# EAGLE board CT_schematic (EAGLE 7.6.0)

Size 100 x 80 mm. Coordinates in mm from the lower left corner, seen from the top.
Outline: 0,0 100,0 100,80 0,80 0,0
Copper layers (1*16): Top 0.035mm / dielectric 1.5mm / Bottom 0.035mm
Design rules "default": minimum track width 10mil, minimum drill 24mil, track to track 8mil, track to pad 8mil, pad to pad 8mil, via to via 8mil, smd to smd 8mil, copper to edge 40mil, drill to drill 8mil, minimum pad ring 10mil, minimum via ring 8mil, stop-mask expansion 4mil, vias tented up to drill 0mil, thermal gap 10mil

## Footprints (pad centres in the part's own frame; a part is rotated, then mirrored left to right if it is on the bottom)
C0603 = smd 0.8 x 0.8: 1 -0.762,0; 2 0.762,0
C0402 = smd 0.5 x 0.5: 1 -0.508,0; 2 0.508,0
C1210 = smd 1.2 x 2.5: 1 -1.524,0; 2 1.524,0
C1206 = smd 1.3 x 1.6: 1 -1.524,0; 2 1.524,0
L0603 = smd 0.8 x 0.8: 1 -0.762,0; 2 0.762,0
L1210 = smd 1.2 x 2.5: 1 -1.524,0; 2 1.524,0
R0603 = smd 0.8 x 0.8: 1 -0.762,0; 2 0.762,0
LQFP32 = smd 0.54 x 0.85: 1 -2.8,-4.275; 2 -2,-4.275; 3 -1.2,-4.275; 4 -0.4,-4.275; 5 0.4,-4.275; 6 1.19,-4.275; 7 1.99,-4.275; 8 2.79,-4.275; 17 2.8,4.275; 18 2,4.275; 19 1.2,4.275; 20 0.4,4.275; 21 -0.4,4.275; 22 -1.2,4.275; 23 -2,4.275; 24 -2.8,4.275 | smd 0.85 x 0.54: 9 4.275,-2.8; 10 4.275,-2; 11 4.275,-1.2; 12 4.275,-0.4; 13 4.275,0.4; 14 4.275,1.2; 15 4.275,2; 16 4.275,2.8; 25 -4.275,2.8; 26 -4.275,2; 27 -4.275,1.2; 28 -4.275,0.4; 29 -4.275,-0.4; 30 -4.275,-1.2; 31 -4.275,-2; 32 -4.275,-2.8
SSOP-16 = smd 1.981 x 0.356: 1 -2.464,2.223; 2 -2.464,1.587; 3 -2.464,0.953; 4 -2.464,0.318; 5 -2.464,-0.318; 6 -2.464,-0.953; 7 -2.464,-1.587; 8 -2.464,-2.223; 9 2.464,-2.223; 10 2.464,-1.587; 11 2.464,-0.953; 12 2.464,-0.318; 13 2.464,0.318; 14 2.464,0.953; 15 2.464,1.587; 16 2.464,2.223
HTSS-105-01-G-D = drill 1 pad 1.8 square: 1 0,0 | drill 1 pad 1.8: 2 0,2.54; 3 2.54,0; 4 2.54,2.54; 5 5.08,0; 6 5.08,2.54; 7 7.62,0; 8 7.62,2.54; 9 10.16,0; 10 10.16,2.54
TSSOP20-I = smd 0.4 x 1.35: 1 -2.925,-2.875; 2 -2.275,-2.875; 3 -1.625,-2.875; 4 -0.975,-2.875; 5 -0.325,-2.875; 6 0.325,-2.875; 7 0.975,-2.875; 8 1.625,-2.875; 9 2.275,-2.875; 10 2.925,-2.875; 11 2.925,2.875; 12 2.275,2.875; 13 1.625,2.875; 14 0.975,2.875; 15 0.325,2.875; 16 -0.325,2.875; 17 -0.975,2.875; 18 -1.625,2.875; 19 -2.275,2.875; 20 -2.925,2.875
ASEK = smd 1.4 x 1: 1 -1.1,-0.8; 2 1.1,-0.8; 3 1.1,0.8; 4 -1.1,0.8
ASFL1 = smd 1.7 x 1.5: 1 -1.27,-1.1; 2 1.27,-1.1; 3 1.27,1.1; 4 -1.27,1.1
SOIC-8_EP = smd 1.6 x 0.533: 1 -2.921,1.905; 2 -2.921,0.635; 3 -2.921,-0.635; 4 -2.921,-1.905; 5 2.921,-1.905; 6 2.921,-0.635; 7 2.921,0.635; 8 2.921,1.905 | smd 2.54 x 3.302: EPAD 0,0 | drill 0.406 pad 0.406: P$1 -0.508,0.635; P$2 0.381,0.635; P$3 -0.508,-0.635; P$4 0.381,-0.635
DFN8_2X3MC = smd 0.813 x 0.305: 1 -1.398,0.75; 2 -1.398,0.25; 3 -1.398,-0.25; 4 -1.398,-0.75; 5 1.398,-0.75; 6 1.398,-0.25; 7 1.398,0.25; 8 1.398,0.75 | smd 1.753 x 1.549: 9 0,0
JST-2-SMD = smd 1 x 4.6: 1 -1,-3.7; 2 1,-3.7 | smd 1.6 x 3.4: NC1 -3.4,1.5; NC2 3.4,1.5
FCI_10118193-0001LF = smd 0.4 x 1.35: 1 -1.3,2.675; 2 -0.65,2.675; 3 0,2.675; 4 0.65,2.675; 5 1.3,2.675 | smd 1.6 x 1.4: 6 -3.2,2.45; 7 3.2,2.45 | smd 1.9 x 1.9: 8 -1.2,0; 9 1.2,0 | hole 0.5: -3.3,0; 3.3,0
SON-6 = smd 0.55 x 0.3: 1 -0.355,0.5 | smd 0.52 x 0.3: 2 -0.37,0; 3 -0.37,-0.5; 4 0.37,-0.5; 5 0.37,0; 6 0.37,0.5
SW_4-1437565-2 = smd 1.4 x 2.1: 1 -2.23,4.55; 2 -2.23,-4.55; 3 2.23,4.55; 4 2.23,-4.55
LGM67K-G1J2-24-Z = smd 0.8 x 1.4: A -2,0; C 0,0
NC7SZ125M5X = smd 1.3 x 0.7: 1 -1.3,0.95; 2 -1.3,0; 3 -1.3,-0.95; 4 1.3,-0.95; 5 1.3,0.95
DUMMY_PACKAGE_126 = drill 0.3: 1 0,-1; 2 1.5,-1; 3 3,-1

## Placement (x,y rotation side)
C1  1e-07  [C0603]  -57.15,52.07 0 top  (outside the outline)
C2  1e-07  [C0603]  -60.96,52.07 0 top  (outside the outline)
C3  1e-07  [C0603]  -64.77,52.07 0 top  (outside the outline)
C4  1e-07  [C0603]  -15.24,57.15 0 top  (outside the outline)
C5  4.7e-06  [C0603]  -49.53,52.07 0 top  (outside the outline)
C6  1e-08  [C0603]  -19.05,57.15 0 top  (outside the outline)
C7  1e-06  [C0603]  -22.86,57.15 0 top  (outside the outline)
C8  1e-06  [C0603]  -26.67,57.15 0 top  (outside the outline)
C9  1e-06  [C0603]  -30.48,57.15 0 top  (outside the outline)
C10  2.2e-07  [C0603]  -53.34,52.07 0 top  (outside the outline)
C11  1e-06  [C0603]  -34.29,57.15 0 top  (outside the outline)
C12  1e-06  [C0603]  -38.1,57.15 0 top  (outside the outline)
C13  1e-07  [C0402]  -15.24,62.23 0 top  (outside the outline)
C14  1e-07  [C0402]  -19.05,62.23 0 top  (outside the outline)
C15  1e-07  [C0402]  -22.86,62.23 0 top  (outside the outline)
C16  1e-07  [C0402]  -26.67,62.23 0 top  (outside the outline)
C17  1e-07  [C0402]  -30.48,62.23 0 top  (outside the outline)
C18  1e-07  [C0402]  -34.29,62.23 0 top  (outside the outline)
C19  1e-08  [C0402]  -38.1,62.23 0 top  (outside the outline)
C20  1e-08  [C0402]  -41.91,62.23 0 top  (outside the outline)
C21  1e-05  [C1210]  -57.15,38.1 0 top  (outside the outline)
C22  1e-05  [C1210]  -63.5,38.1 0 top  (outside the outline)
C23  1e-05  [C1210]  -16.51,46.99 0 top  (outside the outline)
C24  1e-05  [C1210]  -22.86,46.99 0 top  (outside the outline)
C25  1e-07  [C0402]  -45.72,62.23 0 top  (outside the outline)
C26  1e-05  [C1206]  -35.56,45.72 0 top  (outside the outline)
C27  1e-05  [C1206]  -41.91,45.72 0 top  (outside the outline)
C28  1e-08  [C0402]  -49.53,62.23 0 top  (outside the outline)
F1  240.0  [L0603]  -41.91,57.15 0 top  (outside the outline)
I1  1e-05  [L1210]  -29.21,46.99 0 top  (outside the outline)
R1  10000.0  [R0603]  -25.4,52.07 0 top  (outside the outline)
R2  1000.0  [R0603]  -45.72,57.15 0 top  (outside the outline)
R3  1600.5  [R0603]  -49.53,57.15 0 top  (outside the outline)
R4  4700.0  [R0603]  -53.34,57.15 0 top  (outside the outline)
R5  10000.0  [R0603]  -30.48,52.07 0 top  (outside the outline)
R6  100000.0  [R0603]  -62.23,45.72 0 top  (outside the outline)
R7  4031.5447154472  [R0603]  -57.15,45.72 0 top  (outside the outline)
R8  2200.0  [R0603]  -57.15,57.15 0 top  (outside the outline)
R9  10000.0  [R0603]  -35.56,52.07 0 top  (outside the outline)
R10  10000.0  [R0603]  -40.64,52.07 0 top  (outside the outline)
R11  9100.0  [R0603]  -60.96,57.15 0 top  (outside the outline)
R12  680000.0  [R0603]  -15.24,52.07 0 top  (outside the outline)
R13  120000.0  [R0603]  -20.32,52.07 0 top  (outside the outline)
R14  2000.0  [R0603]  -64.77,57.15 0 top  (outside the outline)
R15  10000.0  [R0603]  -45.72,52.07 0 top  (outside the outline)
U1  STM32L031K4T6  [LQFP32]  -24.13,7.62 0 top  (outside the outline)
U2  LTC2804CGN-1#PBF  [SSOP-16]  -44.45,20.32 0 top  (outside the outline)
U3  HTSS-105-01-G-D  [HTSS-105-01-G-D]  -63.5,19.05 0 top  (outside the outline)
U4  SP3203ECY-L/TR  [TSSOP20-I]  -59.69,6.35 0 top  (outside the outline)
U5  HTSS-105-01-G-D  [HTSS-105-01-G-D]  -27.94,29.21 0 top  (outside the outline)
U6  ASEK-32.768KHz-ECST  [ASEK]  -29.21,39.37 0 top  (outside the outline)
U7  ASFL1-12MHZ-NCS  [ASFL1]  -44.45,30.48 0 top  (outside the outline)
U8  MIC5234YME  [SOIC-8_EP]  -36.83,38.1 0 top  (outside the outline)
U9  MCP73831T-2ACI/MC  [DFN8_2X3MC]  -64.77,60.96 0 top  (outside the outline)
U10  S2B-PH-SM4-TB(LF)(SN)  [JST-2-SMD]  -22.86,21.59 0 top  (outside the outline)
U11  10118193-0001LF  [FCI_10118193-0001LF]  -53.34,29.21 0 top  (outside the outline)
U12  TPS3895ADRYR  [SON-6]  -58.42,60.96 0 top  (outside the outline)
U13  4-1437565-2  [SW_4-1437565-2]  -44.45,6.35 0 top  (outside the outline)
U14  Q65110A2395  [LGM67K-G1J2-24-Z]  -45.72,39.37 0 top  (outside the outline)
U15  nc7sz125m5x  [NC7SZ125M5X]  -46.99,45.72 0 top  (outside the outline)
U16  Dummy  [DUMMY_PACKAGE_126]  -55.88,62.23 0 top  (outside the outline)

## Library data of the parts
C1-C28 F1 I1 R1-R15 U1-U16 = circuit_tree

## Nets
CLK_U1_2: U1.2 U6.3
CLK_U1_6: U1.6 U7.3
GND: C1.2 C2.2 C3.2 C4.2 C5.2 C6.2 C7.2 C8.2 C9.2 C11.2 C12.2 C13.2 C14.2 C17.2 C18.2 C19.2 C20.2 C21.2 C22.2 C23.2 C24.2 C25.2 C26.2 C27.2 C28.2 R2.2 R5.2 R8.2 R11.2 R13.2 R14.2 U1.16 U1.32 U2.8 U3.9 U4.18 U5.9 U6.2 U7.2 U8.7 U8.EPAD U9.6 U9.9 U10.2 U11.5 U11.6 U11.7 U11.8 U11.9 U12.2 U14.C U15.1 U15.3 U16.1
INPUT_USBPOWER_5V: C26.1 R15.2 U9.1 U9.2 U11.1
NET_U1_4: R4.1 U1.4 U15.4
NET_U1_5: C6.1 C7.1 F1.1 U1.5
NET_U1_29: R3.1 U1.29 U14.A
NET_U1_30: R1.1 U1.30 U13.3 U13.4
NET_U1_31: R5.1 U1.31
NET_U2_6: C8.1 U2.6
NET_U2_7: C10.1 I1.2 U2.7
NET_U2_9: C9.1 U2.9
NET_U2_10: C10.2 U2.10
NET_U2_11: R6.1 U2.11
NET_U3_3: U2.1 U3.3
NET_U3_4: U2.2 U3.4
NET_U3_5: U2.3 U3.5
NET_U3_6: U2.4 U3.6
NET_U4_1: C15.1 U4.1
NET_U4_2: C17.1 U4.2
NET_U4_3: C15.2 U4.3
NET_U4_4: C16.1 U4.4
NET_U4_5: C16.2 U4.5
NET_U4_6: C18.1 U4.6
NET_U4_20: U4.20
NET_U5_3: U4.14 U5.3
NET_U5_4: U4.13 U5.4
NET_U5_5: U4.17 U5.5
NET_U5_6: U4.16 U5.6
NET_U8_4: R7.2 R8.1 U8.4
NET_U9_5: R15.1 U9.5
NET_U9_8: R14.1 U9.8
NET_U12_1: R10.1 R11.1 U12.1
NET_U12_3: R12.2 R13.1 U12.3
NET_U12_4: R9.1 U12.4 U15.2
NET_U13_1: R2.1 U13.1 U13.2
PROC_ADC_IN4: U1.10 U16.2
PROC_ADC_IN5: U1.11 U16.3
PROC_LPUART1_CTS: U1.12 U2.13
PROC_LPUART1_RTS: U1.15 U2.15
PROC_LPUART1_RX: U1.9 U2.16
PROC_LPUART1_TX: U1.8 U2.14
PROC_USART2_CTS: U1.13 U4.8
PROC_USART2_RTS: U1.7 U4.10
PROC_USART2_RX: U1.20 U4.11
PROC_USART2_TX: U1.19 U4.7
VCC_S1_3V7: C21.1 C22.1 C27.1 U8.5 U8.8 U9.3 U9.4 U10.1
VCC_TIER1_3V3: C1.1 C2.1 C3.1 C4.1 C5.1 C11.1 C12.1 C13.1 C14.1 C19.1 C20.1 C23.1 C24.1 C25.1 C28.1 F1.2 I1.1 R1.2 R3.2 R4.2 R6.2 R7.1 R9.2 R10.2 R12.1 U1.1 U1.17 U2.5 U2.12 U4.12 U4.19 U6.4 U7.4 U8.1 U12.6 U15.5

## Tracks (layer width: path | path; a pad name or v marks a point on that pad's centre or on a via)
CLK_U1_2  (1 unrouted)
CLK_U1_6  (1 unrouted)
GND  (53 unrouted)
INPUT_USBPOWER_5V  (4 unrouted)
NET_U1_4  (2 unrouted)
NET_U1_5  (3 unrouted)
NET_U1_29  (2 unrouted)
NET_U1_30  (3 unrouted)
NET_U1_31  (1 unrouted)
NET_U2_6  (1 unrouted)
NET_U2_7  (2 unrouted)
NET_U2_9  (1 unrouted)
NET_U2_10  (1 unrouted)
NET_U2_11  (1 unrouted)
NET_U3_3  (1 unrouted)
NET_U3_4  (1 unrouted)
NET_U3_5  (1 unrouted)
NET_U3_6  (1 unrouted)
NET_U4_1  (1 unrouted)
NET_U4_2  (1 unrouted)
NET_U4_3  (1 unrouted)
NET_U4_4  (1 unrouted)
NET_U4_5  (1 unrouted)
NET_U4_6  (1 unrouted)
NET_U5_3  (1 unrouted)
NET_U5_4  (1 unrouted)
NET_U5_5  (1 unrouted)
NET_U5_6  (1 unrouted)
NET_U8_4  (2 unrouted)
NET_U9_5  (1 unrouted)
NET_U9_8  (1 unrouted)
NET_U12_1  (2 unrouted)
NET_U12_3  (2 unrouted)
NET_U12_4  (2 unrouted)
NET_U13_1  (2 unrouted)
PROC_ADC_IN4  (1 unrouted)
PROC_ADC_IN5  (1 unrouted)
PROC_LPUART1_CTS  (1 unrouted)
PROC_LPUART1_RTS  (1 unrouted)
PROC_LPUART1_RX  (1 unrouted)
PROC_LPUART1_TX  (1 unrouted)
PROC_USART2_CTS  (1 unrouted)
PROC_USART2_RTS  (1 unrouted)
PROC_USART2_RX  (1 unrouted)
PROC_USART2_TX  (1 unrouted)
VCC_S1_3V7  (7 unrouted)
VCC_TIER1_3V3  (35 unrouted)